# EAGLE board dc-dc_0_1 (EAGLE 6.4)
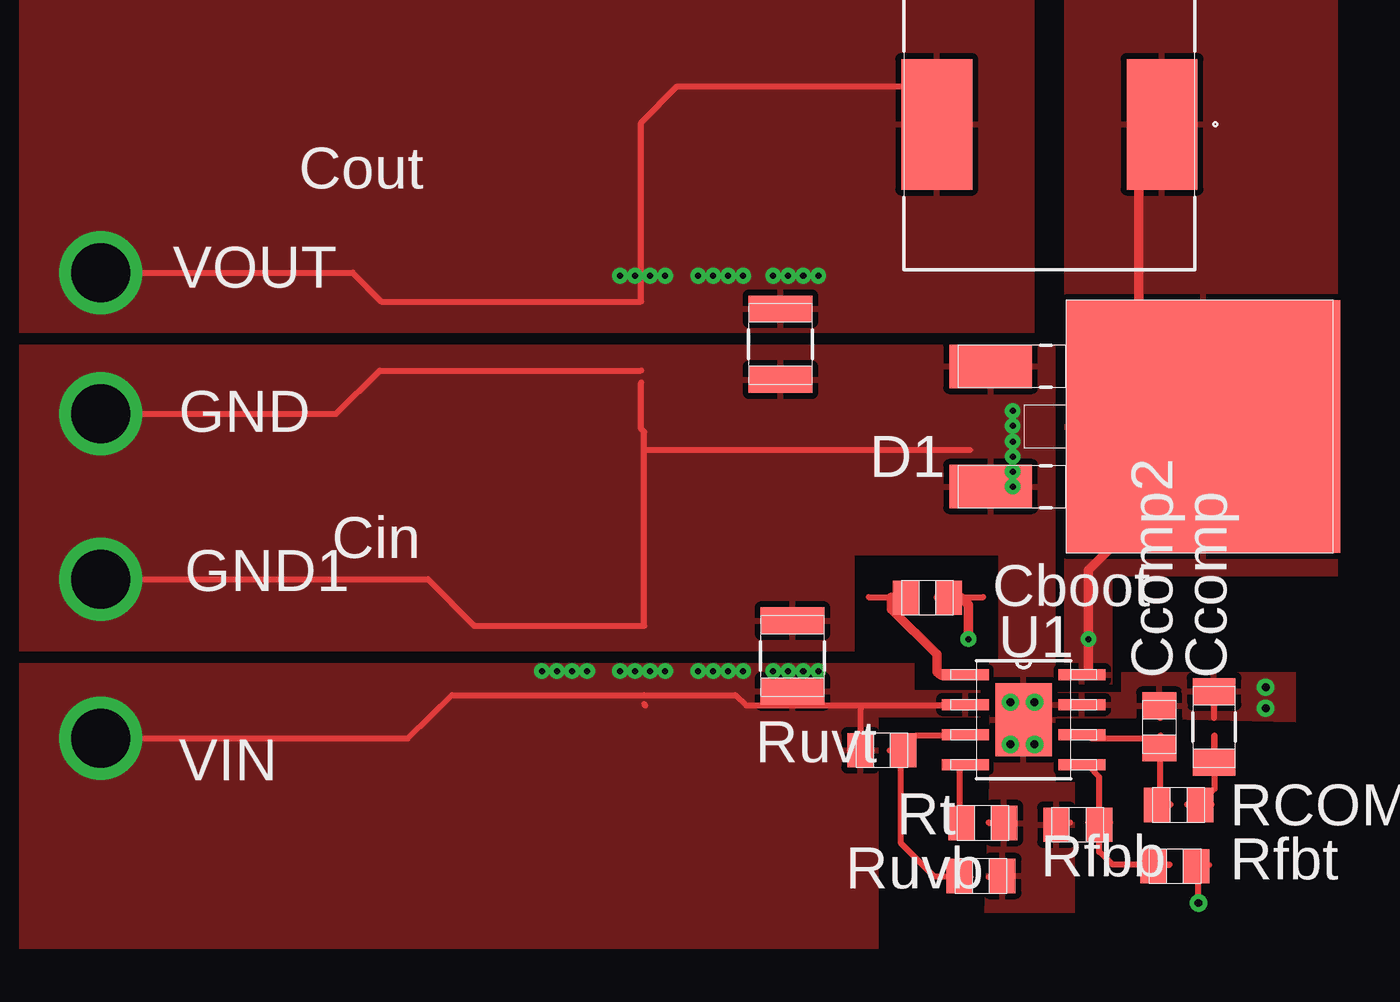
[diagram p0: board, top side]
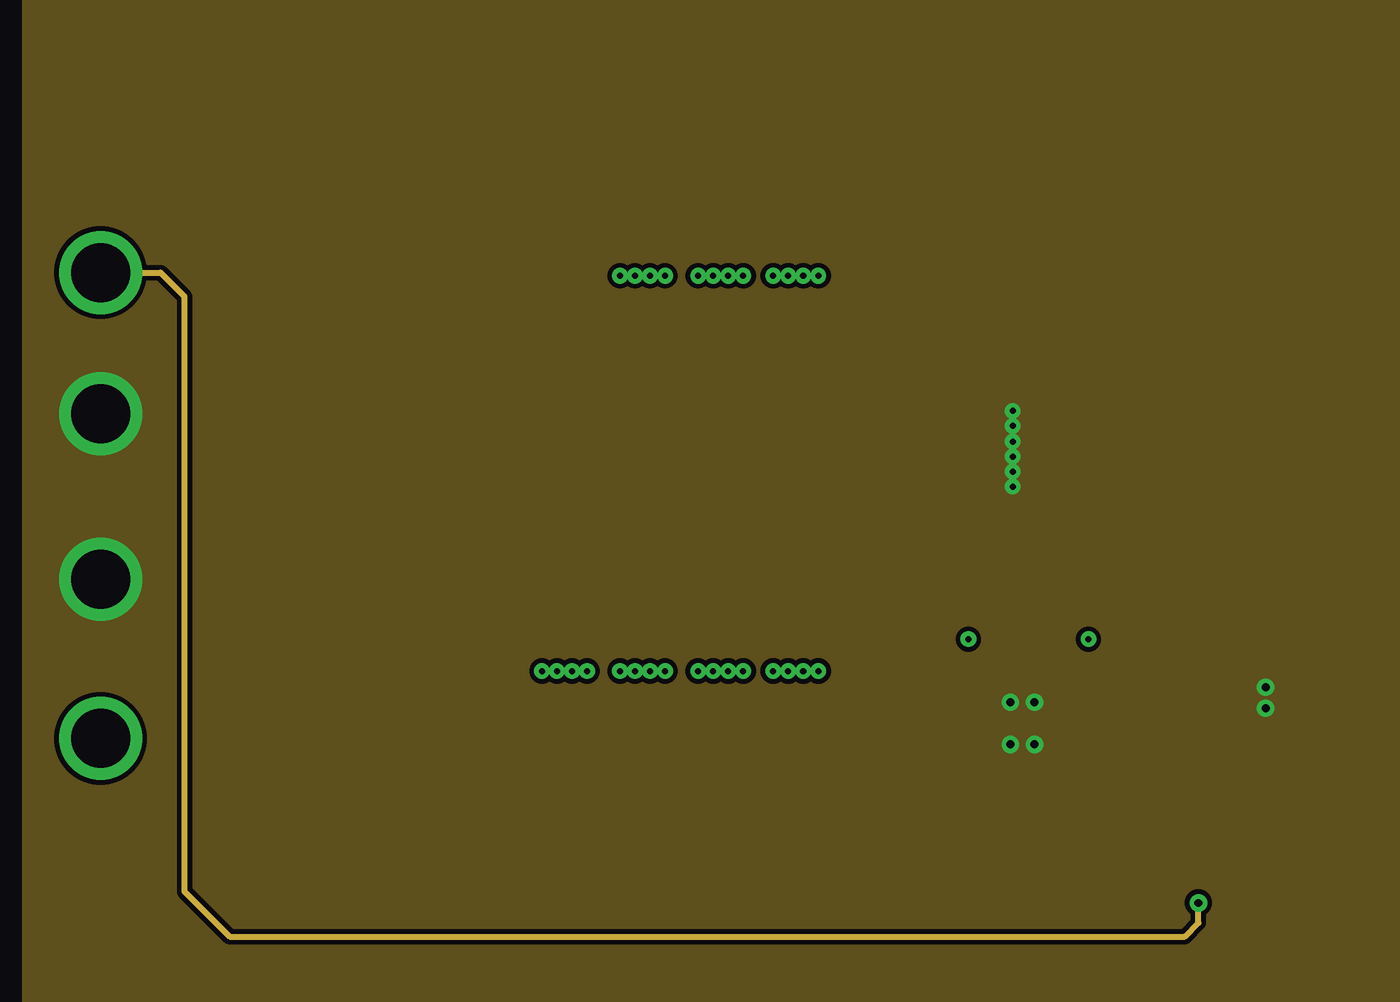
[diagram p1: board, inner layer INTERNAL1]
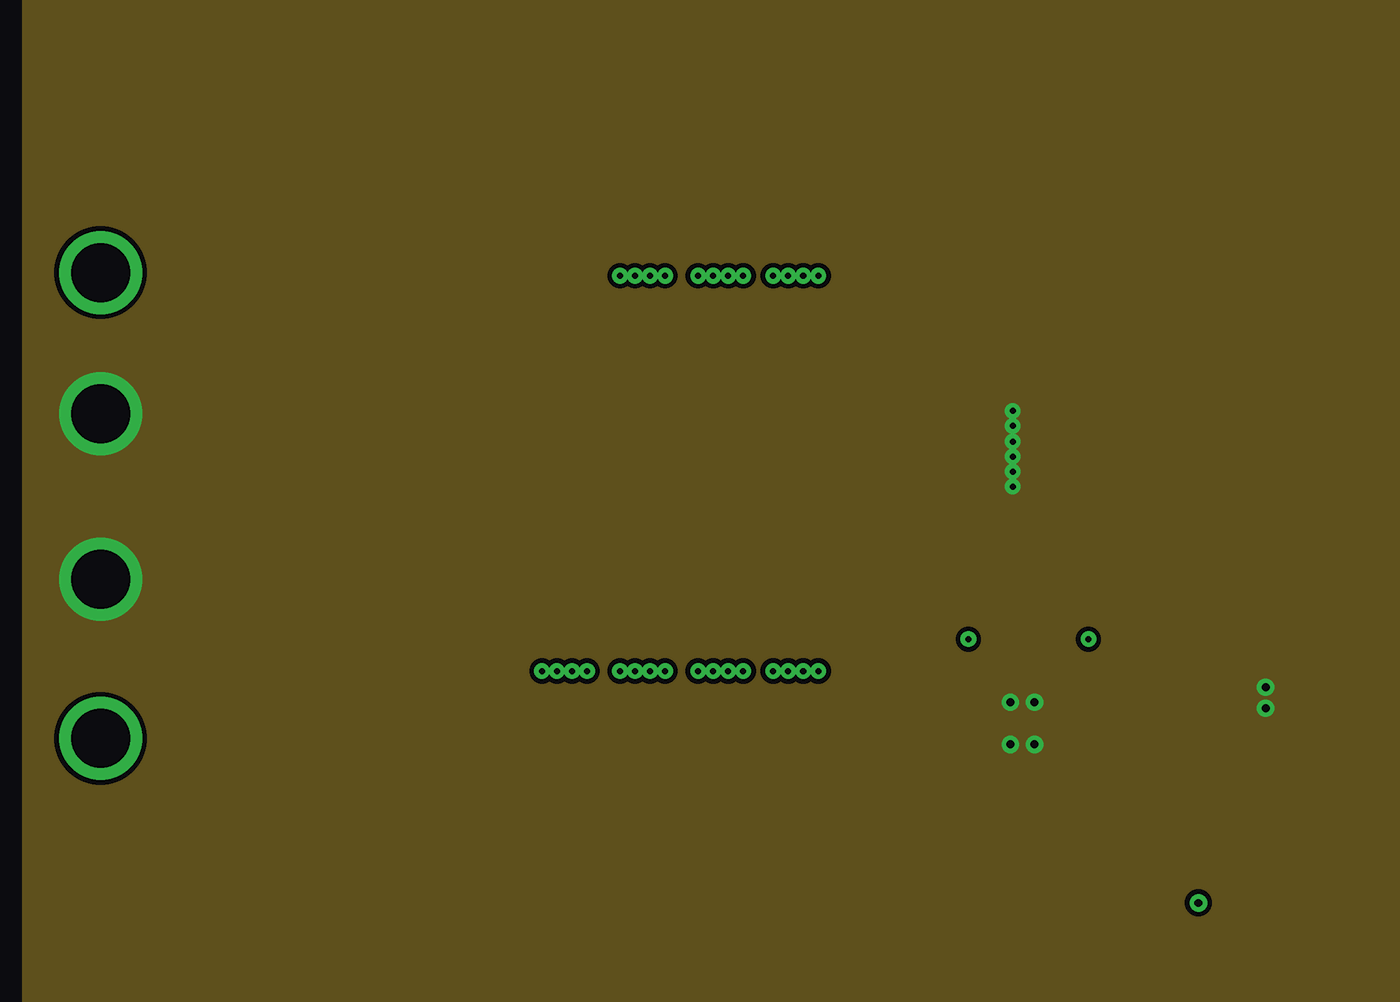
[diagram p2: board, inner layer INTERNAL2]
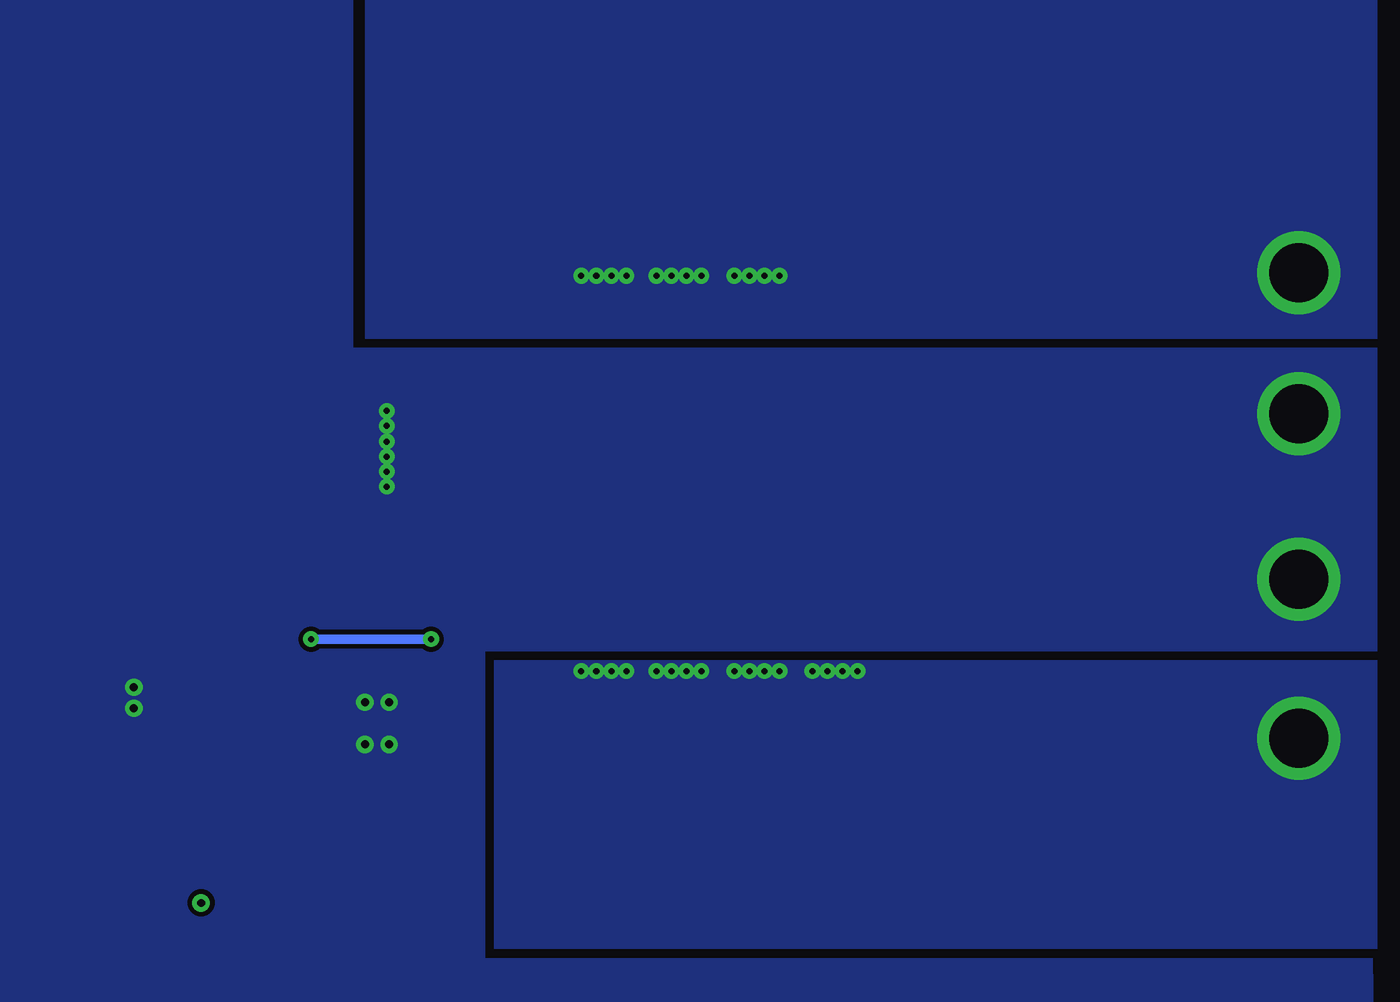
[diagram p3: board, bottom side, seen from below]

No outline drawn. Coordinates in mm, seen from the top.
Copper layers ((1*2)+(15*16)): TOP / INTERNAL1 / layer 15 / BOTTOM

## Footprints (pad centres in the part's own frame; a part is rotated, then mirrored left to right if it is on the bottom)
0805 = smd 1.118 x 1.448: 1 -0.902,0; 2 0.902,0
1206 = smd 1.118 x 1.803: 1 -1.499,0; 2 1.499,0
1210 = smd 1.118 x 2.692: 1 -1.499,0; 2 1.499,0
1210_280 = smd 1.118 x 2.692: 1 -1.499,0; 2 1.499,0
DDPAK = smd 1.831 x 3.501: 1 -2.54,-8.835; 3 2.54,-8.835 | smd 10.67 x 11.605: 2 0,0.152
TP-1502 = drill 0.813 round: 1 0,0
MSS1210 = smd 2.997 x 5.512: 1 -4.763,0; 2 4.763,0
R-PDSO-G8 = smd 1.981 x 0.461: 1 -2.464,1.905; 2 -2.464,0.635; 3 -2.464,-0.635; 4 -2.464,-1.905; 5 2.464,-1.905; 6 2.464,-0.635; 7 2.464,0.635; 8 2.464,1.905 | smd 2.388 x 3.099: 9 0,0

## Placement (x,y rotation side)
Cboot  [0805]  64.82,53.44 0 top
Ccomp  [1206]  76.94,47.98 90 top
Ccomp2  [0805]  74.63,47.98 90 top
Cin  [1210]  59.11,50.98 90 top
Cout  [1210_280]  58.6,64.16 270 top
D1  [DDPAK]  76.33,60.68 270 top
GND  [TP-1502]  29.82,61.19 180 top
GND1  [TP-1502]  29.82,54.18 180 top
L1  [MSS1210]  69.98,73.46 180 top
RCOMP  [0805]  75.44,44.68 180 top
Rfbb  [0805]  71.17,43.84 180 top
Rfbt  [0805]  75.29,42.09 180 top
Rt  [0805]  67.16,43.92 0 top
Ruvb  [0805]  67.08,41.68 0 top
Ruvt  [0805]  62.89,46.99 0 top
U1  [R-PDSO-G8]  68.88,48.29 0 top
VIN  [TP-1502]  29.82,47.5 180 top
VOUT  [TP-1502]  29.82,67.16 180 top

## Library data of the parts
Cboot = ultra-librarian; RefDes: Cboot; Type: C0805C104K4RACTU
Ccomp = ultra-librarian; RefDes: Ccomp; Type: GRM3195C1H133JA01D
Ccomp2 = ultra-librarian; RefDes: Ccomp2; Type: C0805C100K5GACTU
Cin = ultra-librarian; RefDes: Cin; Type: C3225X7R2A225K230AB
Cout = ultra-librarian; RefDes: Cout; Type: GRM32ER61C476ME15L
D1 = ultra-librarian; RefDes: D1; Type: STPS20M100SG-TR
GND = ultra-librarian; RefDes: GND; Type: TP-1502
GND1 = ultra-librarian; RefDes: GND1; Type: TP-1502
L1 = ultra-librarian; RefDes: L1; Type: MSS1210-223MEB
RCOMP = ultra-librarian; RefDes: RCOMP; Type: ERJ-6ENF1652V
Rfbb = ultra-librarian; RefDes: Rfbb; Type: ERJ-6ENF1022V
Rfbt = ultra-librarian; RefDes: Rfbt; Type: ERJ-6ENF1433V
Rt = ultra-librarian; RefDes: Rt; Type: ERJ-6ENF2493V
Ruvb = ultra-librarian; RefDes: Ruvb; Type: 08053C104KAT2A
Ruvt = ultra-librarian; RefDes: Ruvt; Type: 08053C104KAT2A
U1 = ultra-librarian; RefDes: U1; Type: TPS54560DDAR
VIN = ultra-librarian; RefDes: VIN; Type: TP-1502
VOUT = ultra-librarian; RefDes: VOUT; Type: TP-1502

## Nets
0: Ccomp2.2 Ccomp.2 Cin.2 Cout.2 D1.1 D1.3 GND1.1 GND.1 Rfbb.2 Rt.2 Ruvb.2 U1.7 U1.9
1: Ccomp2.1 RCOMP.2 U1.6
2: Rt.1 U1.4
3: Cboot.1 U1.1
4: Rfbb.1 Rfbt.2 U1.5
5: Cboot.2 D1.2 L1.1 U1.8
6: Cin.1 Ruvt.1 U1.2 VIN.1
7: Cout.1 L1.2 Rfbt.1 VOUT.1
20: Ccomp.1 RCOMP.1
29: Ruvb.1 Ruvt.2 U1.3

## Tracks (layer width: path | path; a pad name or v marks a point on that pad's centre or on a via)
0  (via drill 0.25 pad 0.61, 0.33 pad 0.64, 2.49 pad 3.48)
  TOP 0.254: 52.7,63.04 41.66,63.04 39.8,61.21 v29.84,61.21 | 52.83,59.69 52.83,52.25 45.64,52.25 43.69,54.23 v29.84,54.23 | 52.83,59.69 52.83,60.45 52.7,60.58 52.7,62.53 | 66.62,59.69 | 52.83,59.69 66.62,59.69 | 67.41,41.64 68.35,41.64 | 67.41,43.93 68.35,43.93 | 69.9,43.93 70.84,43.93 | 74.66,48.36 74.66,49.3 | 76.95,48.36 76.95,49.3
  other vias: 79.12,48.77 79.12,49.66 69.34,47.24 68.33,47.24 68.43,61.34 68.43,60.71 68.43,60.05 68.43,59.41 68.43,58.78 68.43,58.14 68.33,49.02 69.34,49.02
  pour TOP (rank 6): 26.42,51.18 26.42,64.14 70.23,64.14 70.23,49.45 73.03,49.45 73.03,50.29 80.39,50.29 80.39,48.18 73.03,48.34 70.23,48.34 70.23,45.64 71.04,45.64 71.04,40.13 67.23,40.13 67.44,45.64 67.44,50.8 67.82,50.8 67.82,55.24 61.72,55.24 61.72,51.18
  pour BOTTOM: 26.54,26.16 26.72,38.2 64.26,38.2 64.26,39.37 64.26,51.18 26.54,51.18 26.54,64.01 62.48,64.01 69.85,64.01 69.85,81.41 61.34,81.41 26.54,81.41 26.54,94.23 94.49,94.23 94.49,26.16
  pour INTERNAL1: 26.54,94.23 94.61,94.23 94.61,26.16 26.54,26.16
  pour INTERNAL2: 26.54,94.23 26.54,26.16 94.61,26.16 94.61,94.23
1
  TOP 0.254: 71.63,47.62 71.75,47.5 74.32,47.5 74.68,47.14 | 74.68,47.14 74.68,44.78 74.57,44.7 75.11,44.7 | 74.68,47.14 74.68,47.62 | 75.11,44.7 | 74.09,44.69 75.03,44.69 | 74.66,46.66 74.66,47.6
2
  TOP 0.254: 66.04,46.35 66.19,46.18 66.19,43.94 66.67,43.94 | 66.67,43.94 | 65.71,43.93 66.65,43.93
3
  TOP 0.254: 62.33,53.47 64.26,53.47
  TOP 0.406: 66.04,50.16 65.41,50.16 65.23,50.32 65.23,51.05 63.3,52.96 63.3,53.47 64.26,53.47
4
  TOP 0.254: 71.63,46.35 72.08,45.87 72.08,43.94 72.08,42.7 72.64,42.16 74.57,42.16 75.06,42.16 | 75.06,42.16 | 71.6,43.93 72.54,43.93 | 74.09,42.15 75.03,42.15
5  (via drill 0.25 pad 0.66)
  TOP 0.254: 65.25,53.47 67.18,53.47
  TOP 0.406: 74.09,75.06 73.76,74.73 73.76,59.69 75.34,59.69 76.73,61.09 76.73,59.72 71.63,54.61 71.63,50.16 | v66.55,51.69 66.55,53.14 66.22,53.47 65.28,53.47 | 65.28,53.47
  BOTTOM 0.406: v66.55,51.69 v71.63,51.69
  pour TOP (rank 2): 70.61,49.78 72.64,49.78 72.64,54.36 82.17,54.36 82.17,82.55 70.61,82.55
6  (via drill 0.25 pad 0.61, 2.49 pad 3.48)
  TOP 0.254: v29.84,47.5 42.85,47.5 44.7,49.33 52.83,49.33 56.69,49.33 57.15,48.9 62.1,48.9 | 62.1,48.9 62,48.79 Ruvt.1 | 62.1,48.9 66.04,48.9 | 52.83,48.95 52.88,48.9 | 61.52,46.98 62.46,46.98
  other vias: 51.82,50.34 53.09,50.34 53.72,50.34 48.51,50.34 49.15,50.34 49.78,50.34 50.42,50.34 52.45,50.34 60.2,50.34 59.56,50.34 58.93,50.34 58.29,50.34 57.02,50.34 56.39,50.34 55.75,50.34 55.12,50.34
  pour TOP: 26.42,50.67 26.42,38.61 62.74,38.61 62.74,48.39 63.37,48.39 67.06,48.39 67.06,49.53 64.26,49.53 64.26,50.67
  pour BOTTOM (rank 4): 26.54,50.8 63.88,50.8 63.88,38.61 26.54,38.61
7  (via drill 0.25 pad 0.61, 0.33 pad 0.64, 2.49 pad 3.48)
  TOP 0.254: 65.58,75.06 54.23,75.06 52.7,73.53 52.7,65.96 41.71,65.96 40.51,67.18 v29.84,67.18 | v76.28,40.54 76.28,42.16 75.74,42.16 | 75.74,42.16 | 75.79,42.15 76.73,42.15
  INTERNAL1 0.254: v76.28,40.54 76.28,39.7 75.69,39.12 35.31,39.12 33.4,41.02 33.4,66.17 32.38,67.18 v29.84,67.18
  other vias: 52.45,67.06 51.82,67.06 53.09,67.06 53.72,67.06 55.12,67.06 55.75,67.06 56.39,67.06 57.02,67.06 58.29,67.06 58.93,67.06 59.56,67.06 60.2,67.06
  pour TOP (rank 3): 26.42,64.64 69.34,64.64 69.34,85.6 26.42,85.6
  pour BOTTOM (rank 5): 26.54,64.39 69.34,64.39 69.34,66.67 69.34,81.03 68.83,81.03 26.54,81.03
20
  TOP 0.254: 76.96,47.62 76.96,47.14 76.96,45.36 76.28,44.7 76.83,44.7 | 75.79,44.69 76.73,44.69 | 76.95,46.66 76.95,47.6
29
  TOP 0.254: 66.04,47.62 64.34,47.62 63.7,46.99 63.7,43.05 65.1,41.66 66.19,41.66 | 65.71,41.64 66.65,41.64 | 63.22,46.98 64.16,46.98